# Altium PCB PCB_TP3_Parte1.PcbDoc
Units mm, origin at the board's own origin, x right, y up, seen from the top; angles counter-clockwise.
Board outline 50 x 50 mm, 2 copper layers (Top Layer, Bottom Layer); 19 components, 12 nets, 47 pads, 4 vias.
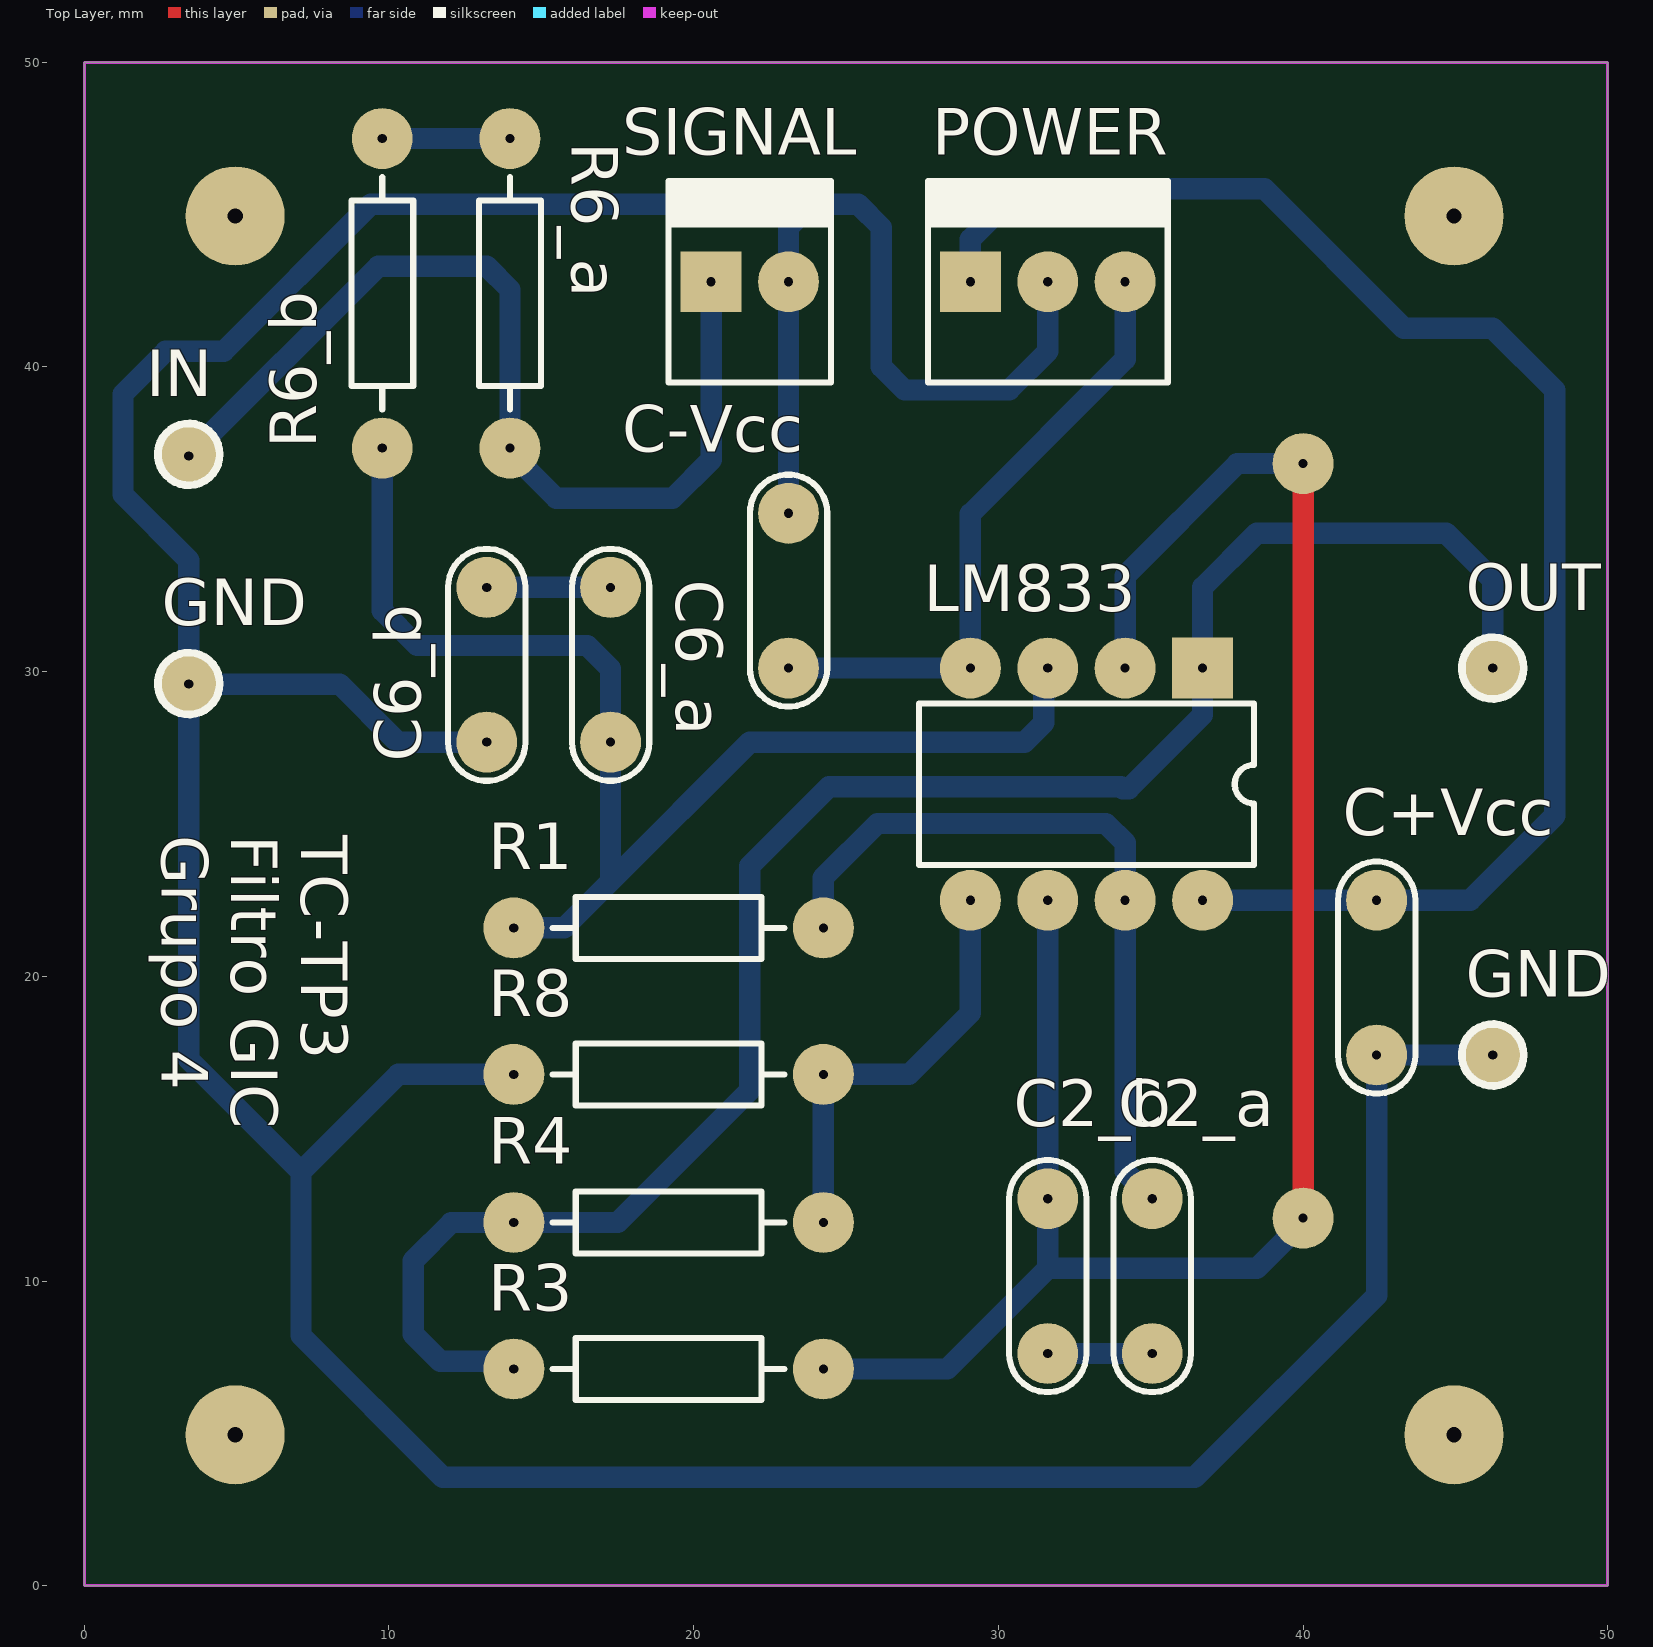
[diagram p0: Top Layer view]
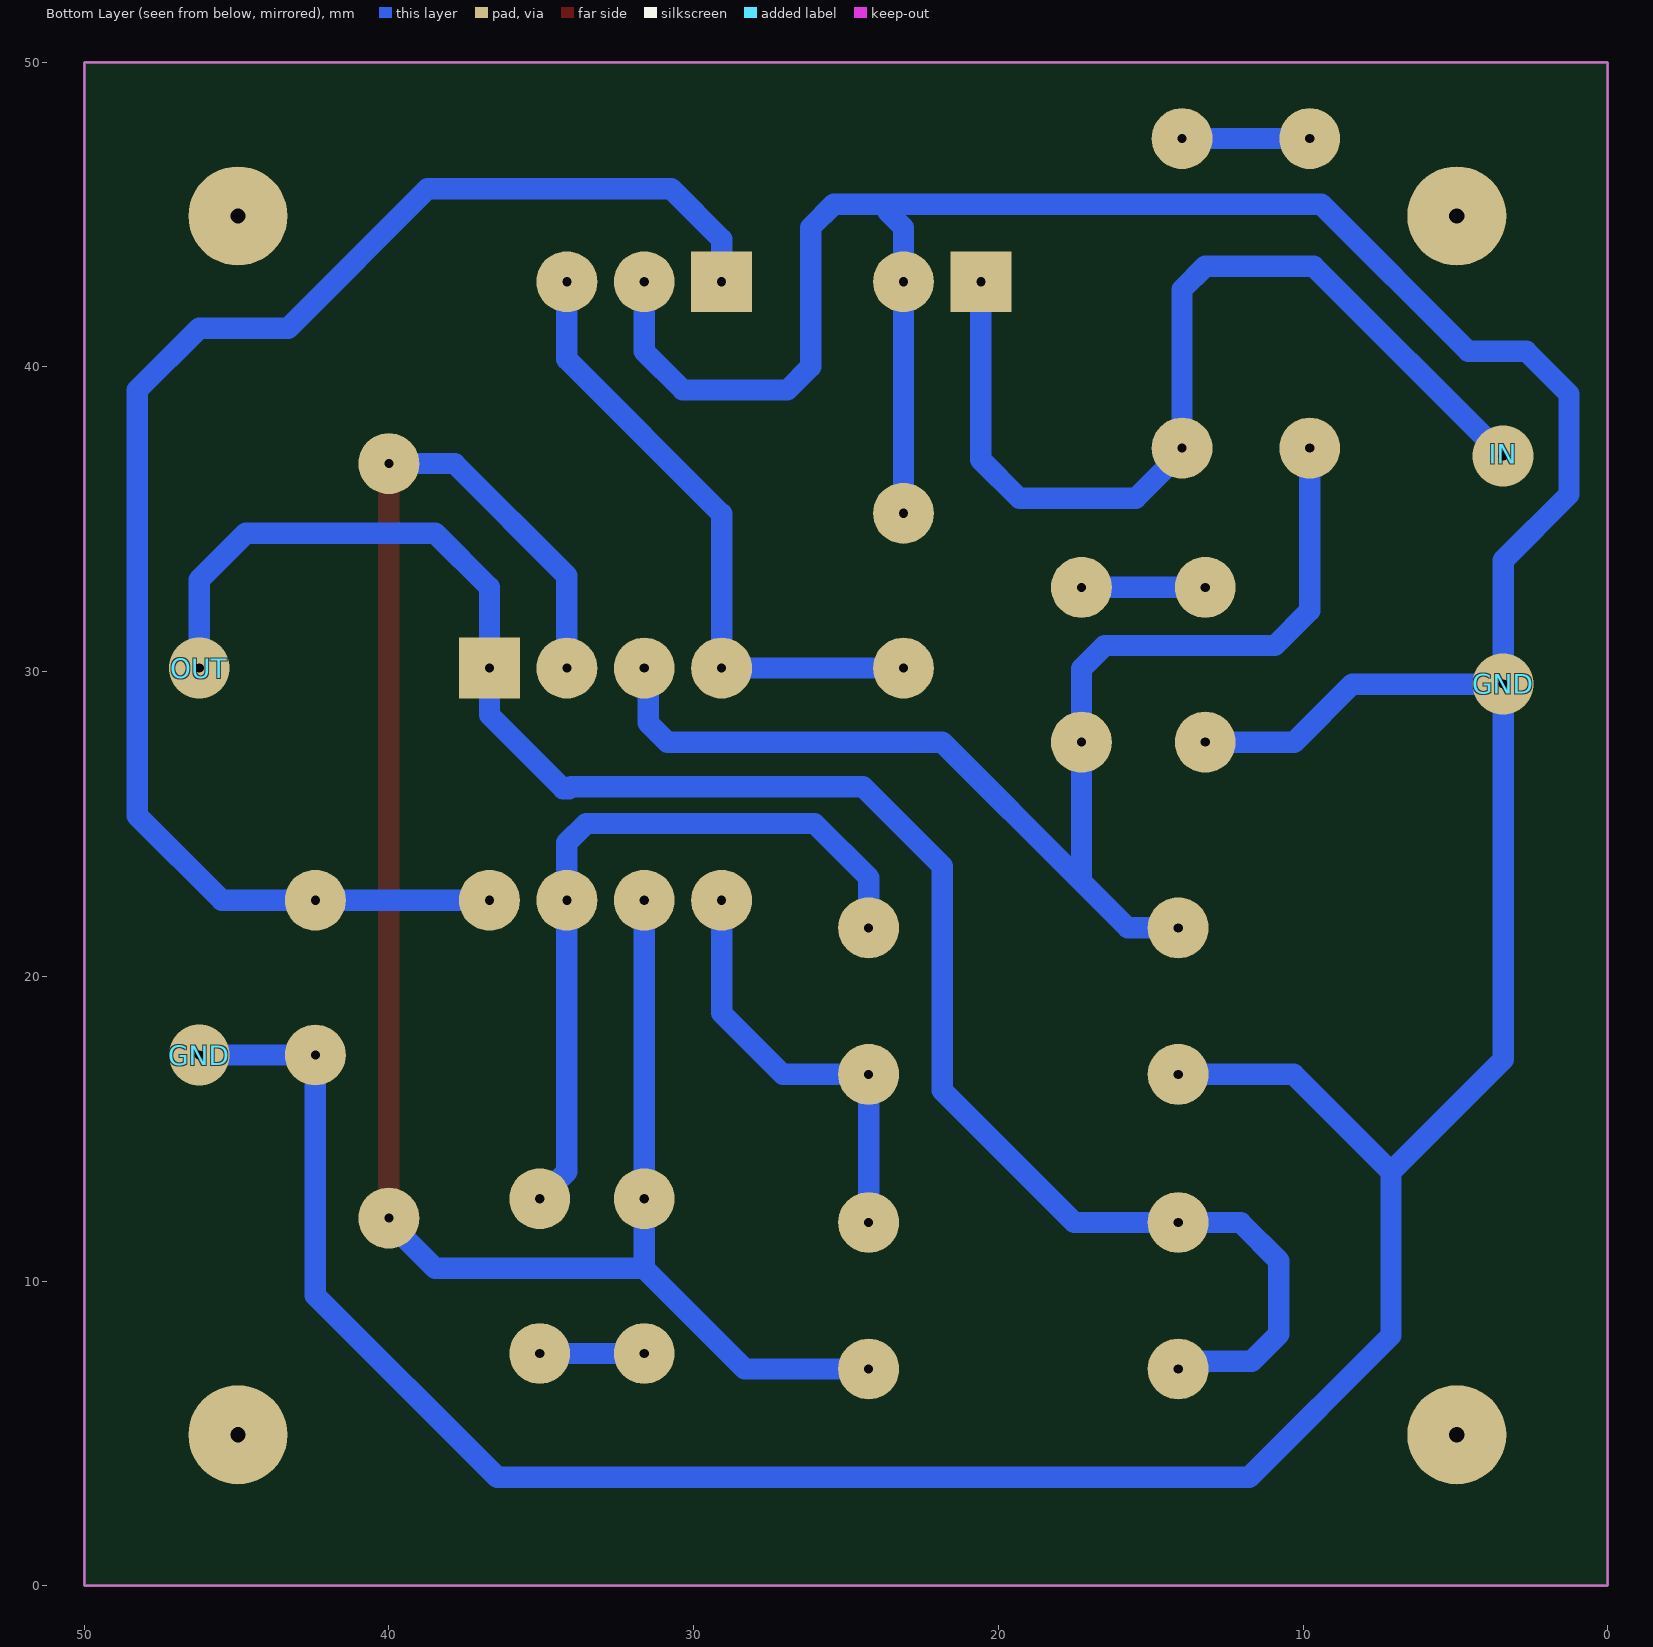
[diagram p1: Bottom Layer view, seen from below]
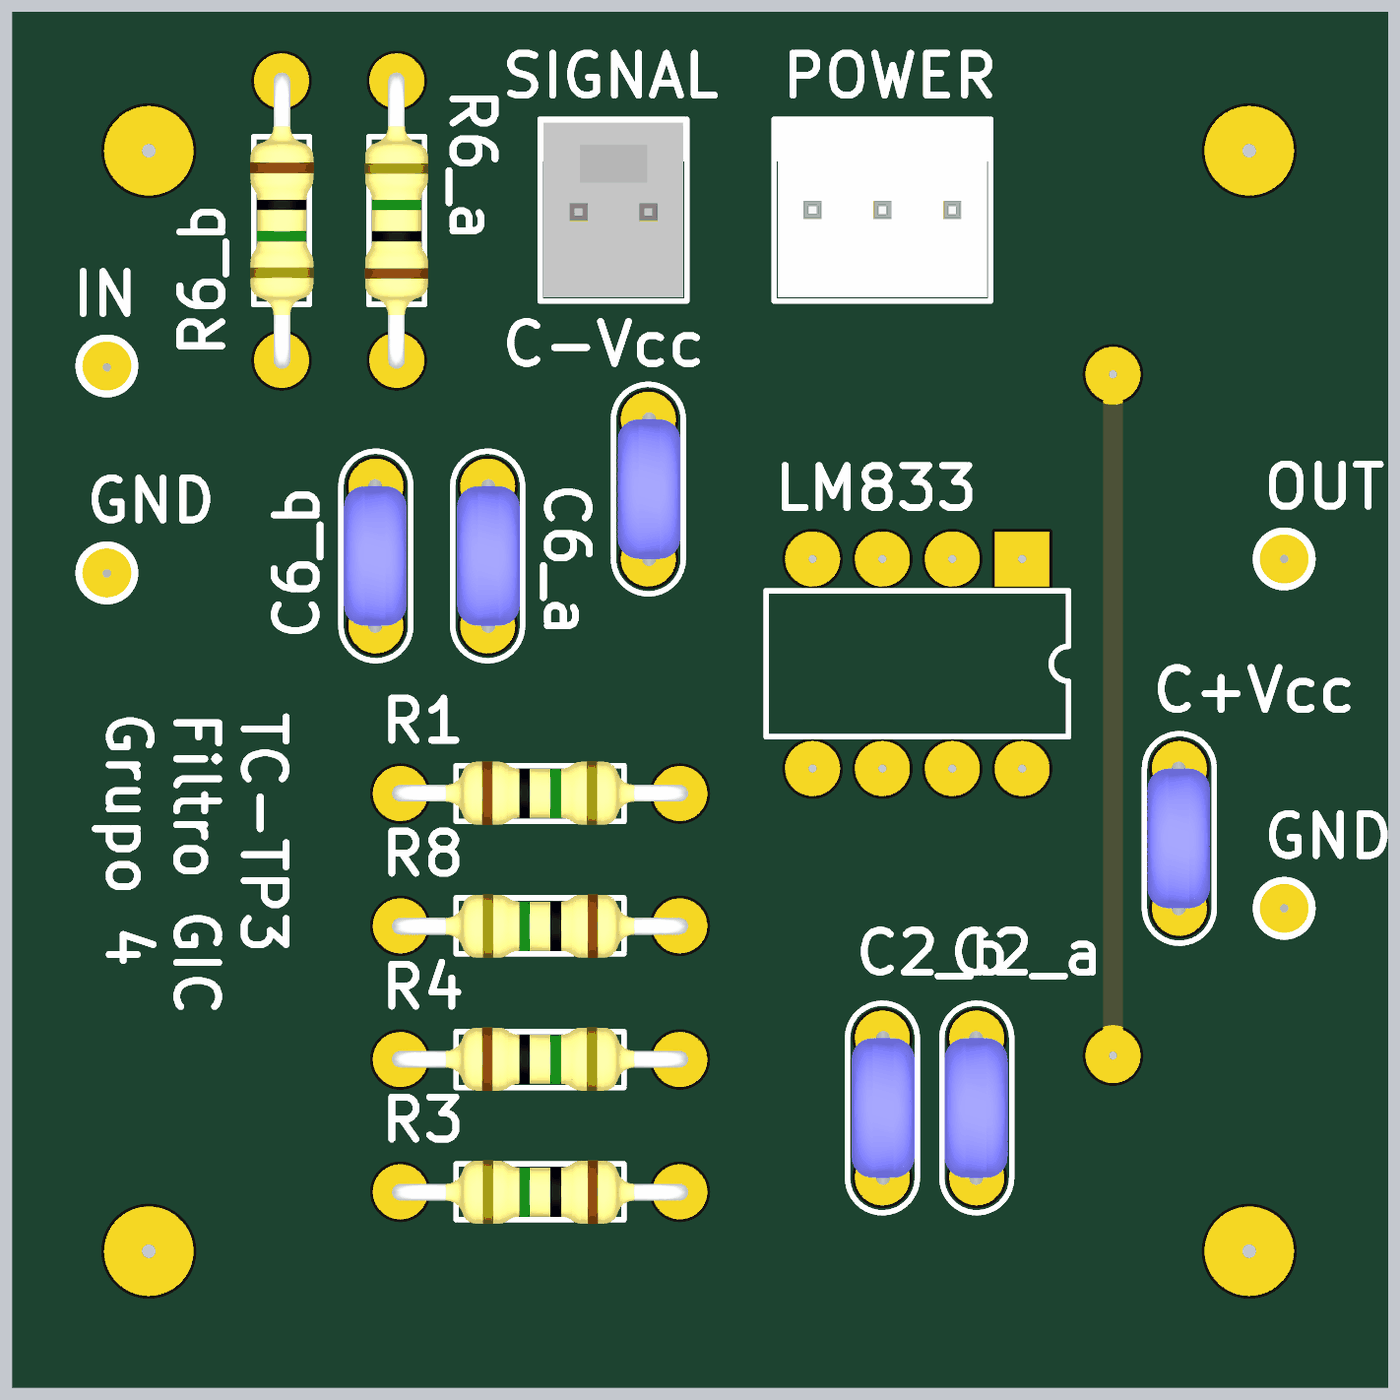
[diagram p2: 3D render of the assembled board from above, using the file's embedded part models]

## Layer stack, top to bottom
Top Solder: solder mask 0.0102, Solder Resist, Dk 3.5
Top Layer: signal copper 0.0356
Dielectric 1: dielectric 0.32, FR-4, Dk 4.8
Bottom Layer: signal copper 0.0356
Bottom Solder: solder mask 0.0102, Solder Resist, Dk 3.5

## Board outline
0,0 50,0 50,50 0,50

## Design rules (kind name [scope] priority, off if disabled: settings)
Clearance [All] p1: gap=0.5 ignorepadtopadclearanceinfootprint=FALSE
PolygonConnect [All] p1: connectstyle=Relief reliefconductorwidth=0.254 reliefentries=4 polygonreliefangle="90 Angle" airgapwidth=0.254
RoutingVias [All] p1: holewidth=0.3 width=2 viastyle="Through Hole" minholewidth=0.3 minwidth=2 maxholewidth=0.3 maxwidth=2
SolderMaskExpansion [All] p1: expansion=0.102
Width [All] p1: maxlimit=0.9 minlimit=0.6 preferedwidth=0.7
30 further rules are at their usual default settings.

## Classes and differential pairs
component class Esquematico_TP3_parte1: C2_a C2_b C6_a C6_b C+Vcc C-Vcc GND IN LM833 OUT POWER R1 R3 R4 R6_a R6_b SIGNAL

## Components (designator, comment, footprint, x,y, rotation, side; value= is the part's Value field where it differs from the comment)
C2_a "0.027u o 27n" CAP200 35.052,10.16 r270 top
C2_b "0.027u o 27n" CAP200 31.623,10.16 r90 top
C6_a "0.027u o 27n" CAP200 17.272,30.226 r90 top
C6_b "0.180u o 180n" CAP200 13.208,30.226 r270 top
C+Vcc "0.1u" CAP200 42.418,19.958 r270 top
C-Vcc "0.1u" CAP200 23.114,32.658 r90 top
GND "PIN" TPSMD 46.228,17.418 r270 top
GND "PIN" TPSMD 3.429,29.61 r0 top
IN "PIN" TPSMD 3.429,37.133 r0 top
LM833 "LM833N" DIP8 32.893,26.308 r180 top
OUT "PIN" TPSMD 46.228,30.118 r270 top
POWER "MOLEX3" MOLEX3 29.083,42.799 r0 top
R1 "3k3" RES400 14.097,21.59 r0 top
R3 "3k3" RES400 24.257,7.112 r180 top
R4 "3k3" RES400 14.097,11.921 r0 top
R6_a "12k" RES400 13.97,37.338 r90 top
R6_b "1k2" RES400 9.779,47.498 r270 top
R8 "3k3" RES400 24.257,16.781 r180 top
SIGNAL "MOLEX2" MOLEX2 20.574,42.799 r0 top

## Footprints (in the part's own frame and the unit in brackets; to place one, negate y for a bottom-side part, rotate by r counter-clockwise, add the part's x,y. Pads: shape width x height; smd on the part's side, far side on the other; paste and mask are expansions set on the pad)
CAP200 [mm]
  round 2 hole 0.3: 1(-2.54,0) 2(2.54,0)
  silkscreen extent -3.81,-1.27 3.81,1.27, body extent -2.79,-1.17 2.79,1.12, height 6.24
DIP8 [mm] "DIP; 8 Leads; Row Spacing 7.62 mm; Pitch 2.54 mm"
  rect 2x2 hole 0.3: 1(-3.81,-3.81)
  round 2 hole 0.3: 2(-1.27,-3.81) 3(1.27,-3.81) 4(3.81,-3.81) 5(3.81,3.81) 6(1.27,3.81) 7(-1.27,3.81) 8(-3.81,3.81)
  silkscreen extent -5.5,-2.65 5.5,2.65
MOLEX2 [mm]
  rect 2x2 hole 0.3: 1(0,0)
  round 2 hole 0.3: 2(2.54,0)
  silkscreen extent -1.4,-3.3 3.94,3.3, body extent -1.27,-3.17 3.81,3.17, height 10.74
MOLEX3 [mm]
  rect 2x2 hole 0.3: 1(0,0)
  round 2 hole 0.3: 2(2.54,0) 3(5.08,0)
  silkscreen extent -1.4,-3.3 6.48,3.3, body extent -1.27,-3.17 6.35,3.17, height 10.74
RES400 [mm]
  round 2 hole 0.3: 1(0,0) 2(10.16,0)
  silkscreen extent 1.27,-1.02 8.89,1.02, body extent -0.3,-1.14 10.46,1.17, height 2.43
TPSMD [mil]
  round 62 smd far side: 1(0,0)
  silkscreen extent -40,-40 40,40

## Part data
C2_a C2_b C6_a C6_b: library part Cap
C+Vcc C-Vcc: library part Cap, "Capactiro Multicapa"
GND GND IN OUT: library part TP, "PIN macho"
LM833: "Low-Noise Dual Operational Amplifier", Code_JEDEC=MO-001-AN, ComponentLink1Description="Manufacturer Link", ComponentLink1URL=http://www.st.com/, ComponentLink2Description=Datasheet, ComponentLink2URL=http://www.st.com/stonline/products/literature/ds/2169/lm833.pdf, DatasheetVersion=Dec-1997, LatestRevisionDate=06-Jun-2005, LatestRevisionNote="Stylized 3D Model Added.", PackageDescription="DIP; 8 Leads; Row Spacing 7.62 mm; Pitch 2.54 mm", PackageReference=DIP8, Published=24-Aug-2001, Publisher="Altium Limited"
POWER SIGNAL: "Alojamiento Polarizado Macho Placa 3 vias"
R1 R3 R4 R6_a R8: library part RES, "Resistencia metal fil 10%"
R6_b: library part RES

## Free pads (board coordinates)
  round 3.25 hole 0.5: 40(4.953,4.953) 41(44.958,4.953) 42(44.958,44.958) 43(4.953,44.958)
  round 2 hole 0.3: 46(40.005,36.83) 47(40.005,12.065)

## Via types
v1: diameter 2, hole 0.3, Top Layer to Bottom Layer, 4 vias

## Nets (pads, with @x,y where several pads share a name; then routed paths per layer and width w, separated by ;. In a path a pad name is that pad's centre, name@x,y a point inside that pad or via, vN(x,y) a via of type N, cw(c..) or ccw(c..) an arc to the next point about the centre after c; other vN are vias at no path point)
+Vcc: C+Vcc.1 LM833.8 POWER.1 | length 50.7
  Bottom Layer w0.7: POWER.1 29.083,44.196 30.734,45.847 38.735,45.847 43.307,41.275 46.228,41.275 48.26,39.243 48.26,25.273 45.485,22.498 C+Vcc.1 LM833.8
-Vcc: C-Vcc.1 LM833.4 POWER.3 | length 20.8
  Bottom Layer w0.7: C-Vcc.1 LM833.4 29.083,35.179 34.163,40.259 POWER.3
GND: C6_b.2 C+Vcc.2 C-Vcc.2 GND.1 POWER.2 R8.2 SIGNAL.2 | length 154.7
  Bottom Layer w0.7: C6_b.2 10.287,27.686 8.382,29.591 v1(3.429,29.591) ; R8.2@14.08,16.764 R8.2 10.304,16.781 7.112,13.589 ; C-Vcc.2 SIGNAL.2 23.114,44.577 23.622,45.085 ; POWER.2 31.623,40.513 30.353,39.243 26.924,39.243 26.162,40.005 26.162,44.577 25.4,45.339 9.398,45.339 4.572,40.513 2.667,40.513 1.27,39.116 1.27,35.814 3.429,33.655 3.429,29.61 v1(3.429,29.591) ; v1(46.228,17.418) C+Vcc.2 42.418,9.525 36.449,3.556 11.765,3.556 7.112,8.209 7.112,13.589 ; v1(3.429,29.591) 3.429,17.272 7.112,13.589
NetC2_a_1: C2_a.1 LM833.7 R1.2 | length 24.6
  Bottom Layer w0.7: R1.2 24.257,23.241 26.035,25.019 33.528,25.019 34.163,24.384 LM833.7 34.163,13.589 C2_a.1
NetC2_a_2: C2_a.2 C2_b.1 | length 3.4
  Bottom Layer w0.7: C2_b.1 C2_a.2
NetC2_b_2: C2_b.2 LM833.2 LM833.6 pad.46 pad.47 R3.1 | length 65.2
  Top Layer w0.7: pad.47 pad.46
  Bottom Layer w0.7: R3.1 28.321,7.112 31.623,10.414 ; LM833.6 C2_b.2 31.623,10.414 ; LM833.2 34.163,33.147 37.846,36.83 pad.46 ; pad.47@40.005,12.192 pad.47 40.005,11.938 38.481,10.414 31.623,10.414
NetC6_a_2: C6_a.2 C6_b.1 | length 4.1
  Bottom Layer w0.7: C6_b.1 C6_a.2
NetLM833_5: LM833.5 R4.2 R8.1 | length 14.2
  Bottom Layer w0.7: R4.2 R8.1 27.068,16.781 29.083,18.796 LM833.5
NetR6_a_2: R6_a.2 R6_b.1 | length 4.2
  Bottom Layer w0.7: R6_b.1 R6_a.2
VGIC: C6_a.1 LM833.3 R1.1 R6_b.2 | length 42.6
  Bottom Layer w0.7: R6_b.2 9.779,32.004 10.922,30.861 16.51,30.861 17.272,30.099 C6_a.1 17.272,23.114 ; R1.1 15.748,21.59 17.272,23.114 ; LM833.3 31.496,29.991 31.496,28.321 30.861,27.686 21.844,27.686 17.272,23.114
Vin: IN.1 R6_a.1 SIGNAL.1 | length 32.4
  Bottom Layer w0.7: v1(3.429,37.084) 9.652,43.307 13.208,43.307 13.97,42.545 R6_a.1 13.97,37.211 15.494,35.687 19.304,35.687 20.574,36.957 SIGNAL.1
Vout: LM833.1 OUT.1 R3.2 R4.1 | length 61.9
  Bottom Layer w0.7: R3.2 13.843,7.366 11.684,7.366 10.795,8.255 10.795,10.668 12.048,11.921 R4.1 17.509,11.921 21.844,16.256 21.844,23.622 24.441,26.219 34.025,26.219 34.082,26.162 34.29,26.162 36.703,28.575 LM833.1 36.703,32.766 38.481,34.544 44.704,34.544 46.228,33.02 v1(46.228,30.118)

## Keep-outs
Keep-Out Layer:
  the board outline again, w0.1

## Silkscreen, mask and mechanical layers (free items; w line width, h text height)
Top Overlay:
  text "TC-TP3 / Filtro GIC / Grupo 4" at 2.54,24.638 h1.52 r270